# Altium PCB charger.PcbDoc
Units mm, origin at the board's own origin, x right, y up, seen from the top; angles counter-clockwise.
Board outline 12 x 18 mm, 2 copper layers (Top Layer, Bottom Layer); 6 components, 4 nets, 19 pads, 4 vias.
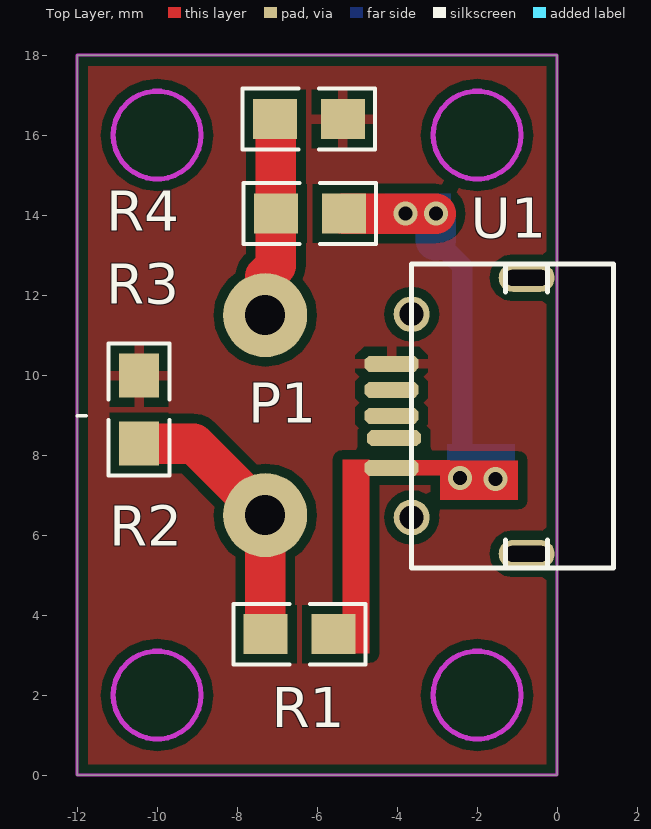
[diagram p0: Top Layer view]
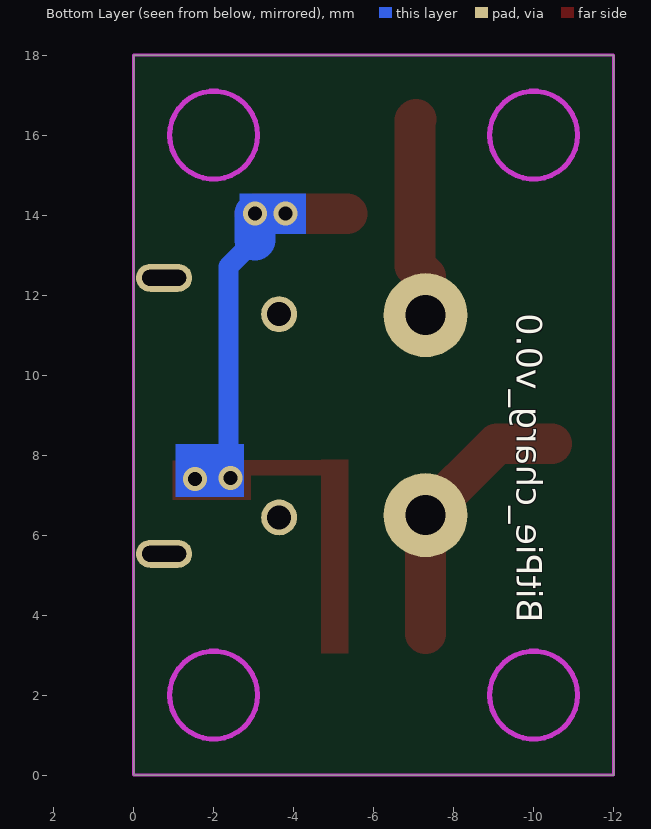
[diagram p1: Bottom Layer view, seen from below]

## Layer stack, top to bottom
Top Layer: signal copper 0.0356
Dielectric: dielectric 0.32, FR-4, Dk 4.8
Bottom Layer: signal copper 0.0356

## Board outline
-12,18 0,18 0,0 -12,0 -12,18

## Design rules (kind name [scope] priority, off if disabled: settings)
Clearance [All] p1: gap=0.229
ComponentClearance [All] p1 off: gap=0.254 collisioncheckmode=3 verticalgap=0.254 showdistances=FALSE
Height [All] p1 off: minheight=0 maxheight=25.4 prefheight=12.7
HoleSize [All] p1 off: absolutevalues=TRUE maxlimit=2.54 minlimit=0.025 maxpercent=80.000 minpercent=20.000
HoleToHoleClearance [All] p1 off: gap=0.254 allowstackedmicrovias=TRUE
LayerPairs [All] p1 off: enforce=TRUE
MinimumSolderMaskSliver [All] p1 off: minsoldermaskwidth=0.254
NetAntennae [All] p1 off: netantennaetolerance=0
PolygonConnect [All] p1: connectstyle=Relief reliefconductorwidth=0.254 reliefentries=4 polygonreliefangle="90 Angle"
RoutingVias [All] p1: holewidth=0.711 width=1.27 viastyle="Through Hole" minholewidth=0.025 minwidth=0.025 maxholewidth=2.54 maxwidth=2.54
SilkToSilkClearance [All] p1 off: silktosilkclearance=0.254
SilkscreenOverComponentPads [All] p1 off: minsilkscreentomaskgap=0.254
SolderMaskExpansion [All] p1: expansion=0.102
TestPointUsage [All] p1: valid=0 allowmultiple=FALSE
Testpoint [All] p1: side=15 testpointundercomponent=TRUE minsize=1.016 maxsize=2.54 preferedsize=1.524 minholesize=0 maxholesize=1.016 preferedholesize=0.813 testpointgrid=0.025 style=1023 order=0-112345678
Width [All] p1: maxlimit=2.54 minlimit=0.254 preferedwidth=0.254
15 further rules are at their usual default settings.

## Components (designator, comment, footprint, x,y, rotation, side; value= is the part's Value field where it differs from the comment)
P1 "Header 2" USB_PIN-2 -7.297,11.5 r0 top
R1 "0R/NC" 0603-1 -6.437,3.522 r0 top
R2 "0R/NC" 0603-1 -10.451,9.135 r90 top
R3 "0R/NC" 0603-1 -6.183,14.038 r0 top
R4 "0R/NC" 0603-1 -6.209,16.4 r0 top
U1 "USB_Micro" usb_micro -2.45,8.983 r270 top

## Footprints (in the part's own frame and the unit in brackets; to place one, negate y for a bottom-side part, rotate by r counter-clockwise, add the part's x,y. Pads: shape width x height; smd on the part's side, far side on the other; paste and mask are expansions set on the pad)
0603-1 [mm] "贴片带丝印"
  rect 1.1x1 smd: 1(-0.85,0) 2(0.85,0)
  silkscreen extent -1.65,-0.76 1.65,0.76, body extent -1.14,-0.38 1.14,0.38, height 1
usb_micro [mm] "USB方孔"
  oval 0.7x1.4 hole 0.4 slot 1.1 at 90 deg: 0(-3.45,1.688) 0(3.45,1.688)
  round 0.9 hole 0.6: 0(-2.54,-1.187) 0(2.54,-1.187)
  oct 0.4x1.35 smd: 1(1.3,-1.687) 2(0.56,-1.631) 3(0,-1.687) 4(-0.65,-1.687) 5(-1.3,-1.687)
  silkscreen extent -3.8,-1.19 3.8,3.86
USB_PIN-2 [mm]
  round 2.1 hole 1: 1(0,0) 2(0,-5)

## Part data
P1: "Header, 2-Pin"
R1 R2 R3 R4: library part R-10K, "resistor"

## Via types
v1: diameter 0.6, hole 0.35, Top Layer to Bottom Layer, 4 vias

## Nets (pads, with @x,y where several pads share a name; then routed paths per layer and width w, separated by ;. In a path a pad name is that pad's centre, name@x,y a point inside that pad or via, vN(x,y) a via of type N, cw(c..) or ccw(c..) an arc to the next point about the centre after c; other vN are vias at no path point)
GND: R2.2 R4.2 U1.5
NetP1_1: P1.1 R3.1 R4.1 | length 5
  Top Layer w1.016: P1.1 -7.297,12.466 -7.033,12.73 -7.033,16.374 R4.1
NetP1_2: P1.2 R1.1 R2.1 | length 6.9
  Top Layer w1.016: R2.1 -9.083,8.285 P1.2 R1.1@-7.297,3.532
VCC: R1.2 R3.2 U1.1 | length 13.9
  Top Layer w0.381: -5.091,7.383 -5.091,7.611 -5.02,7.683 -4.239,7.683 -2.724,7.683 v1@-2.45,7.408
  Top Layer w0.508: -5.091,5.656 -5.091,7.383
  Top Layer w1.016: R3.2 v1(-3.796,14.038) v1(-3.034,14.038)
  Bottom Layer w0.508: -3.034,13.377 -2.373,12.717 -2.373,7.484 v1(-2.424,7.434)
  Bottom Layer w1.016: -3.034,13.377 v1(-3.034,14.038)
  other v1: -1.535,7.408
pads on no net: U1.0 U1.2 U1.3 U1.4

## Polygon pours and split planes (outlines as drawn)
GND on Top Layer "Top Layer-No Net" (solid, pour order 1000): -12,18 0,18 0,0 -12,0 -12,18

## Keep-outs
Keep-Out Layer:
  circle w0.127: c-2,2 r1.1
  circle w0.127: c-10,2 r1.1
  circle w0.127: c-10,16 r1.1
  circle w0.127: c-2,16 r1.1
  lines w0.08: -12,0 0,0 ; -12,0 0,0 ; -12,0 -12,18 0,18 0,5.3 0,0

## Other copper
Top Layer:
  rectangle net VCC: -5.371,3.039 -4.685,7.891
  rectangle net VCC: -2.932,6.875 -0.976,7.865
Bottom Layer:
  rectangle net VCC: -2.754,6.951 -1.053,8.272
  rectangle net VCC: -4.304,13.53 -2.653,14.546

## Silkscreen, mask and mechanical layers (free items; w line width, h text height)
Top Overlay:
  lines w0.08: -12,8.983 -11.771,8.983
Bottom Overlay:
  text "BitPie_charg_v0.0" at -9.576,3.81 h0.64 r90